# EAGLE board sensact_eagle_2.0g (EAGLE 7.5.0)
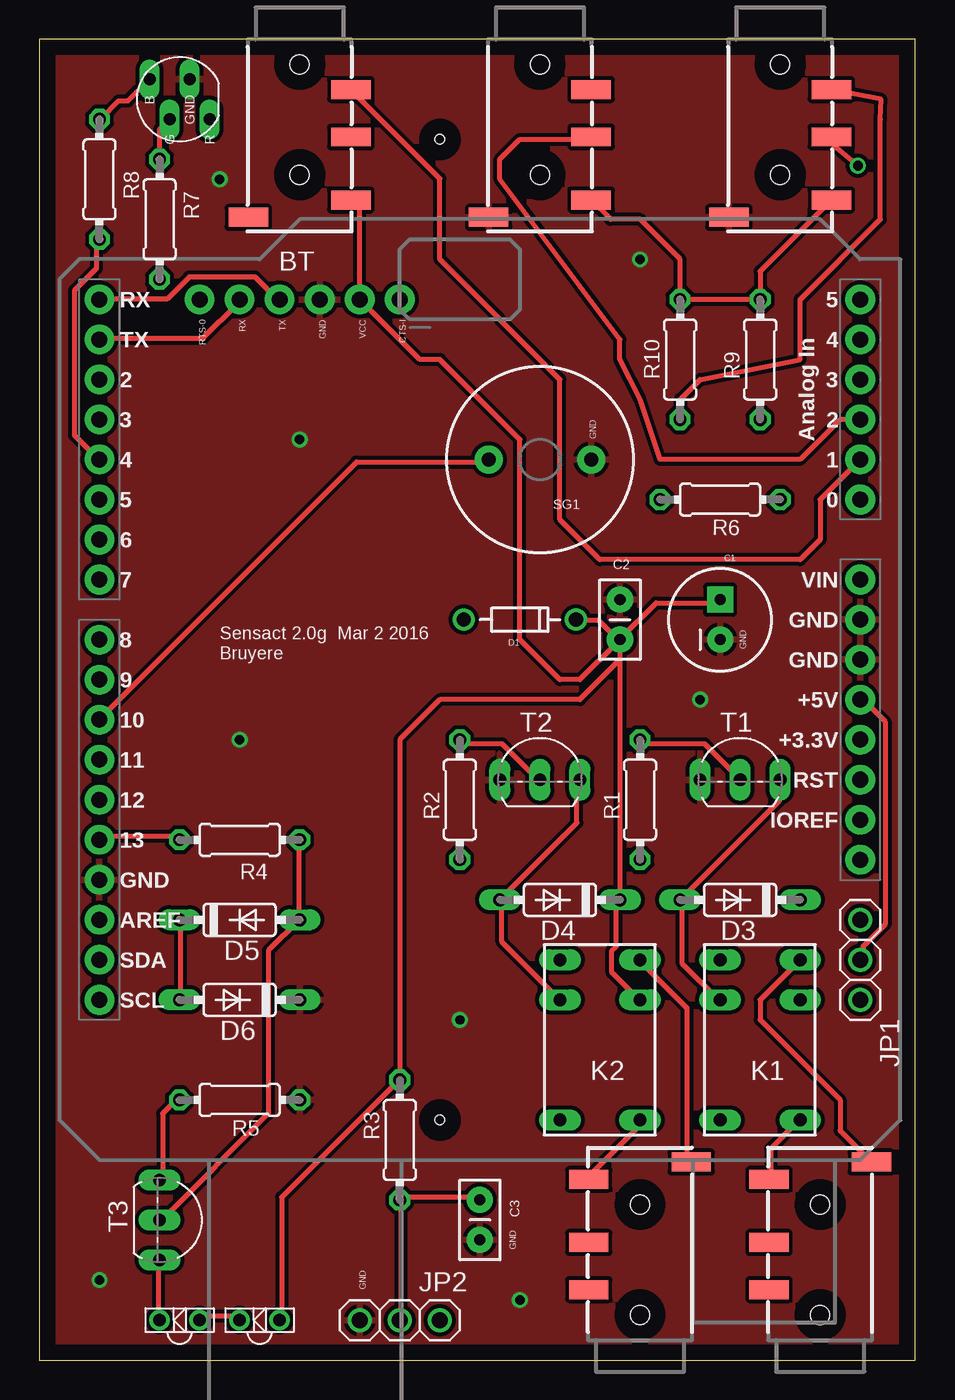
[diagram p0: board, top side]
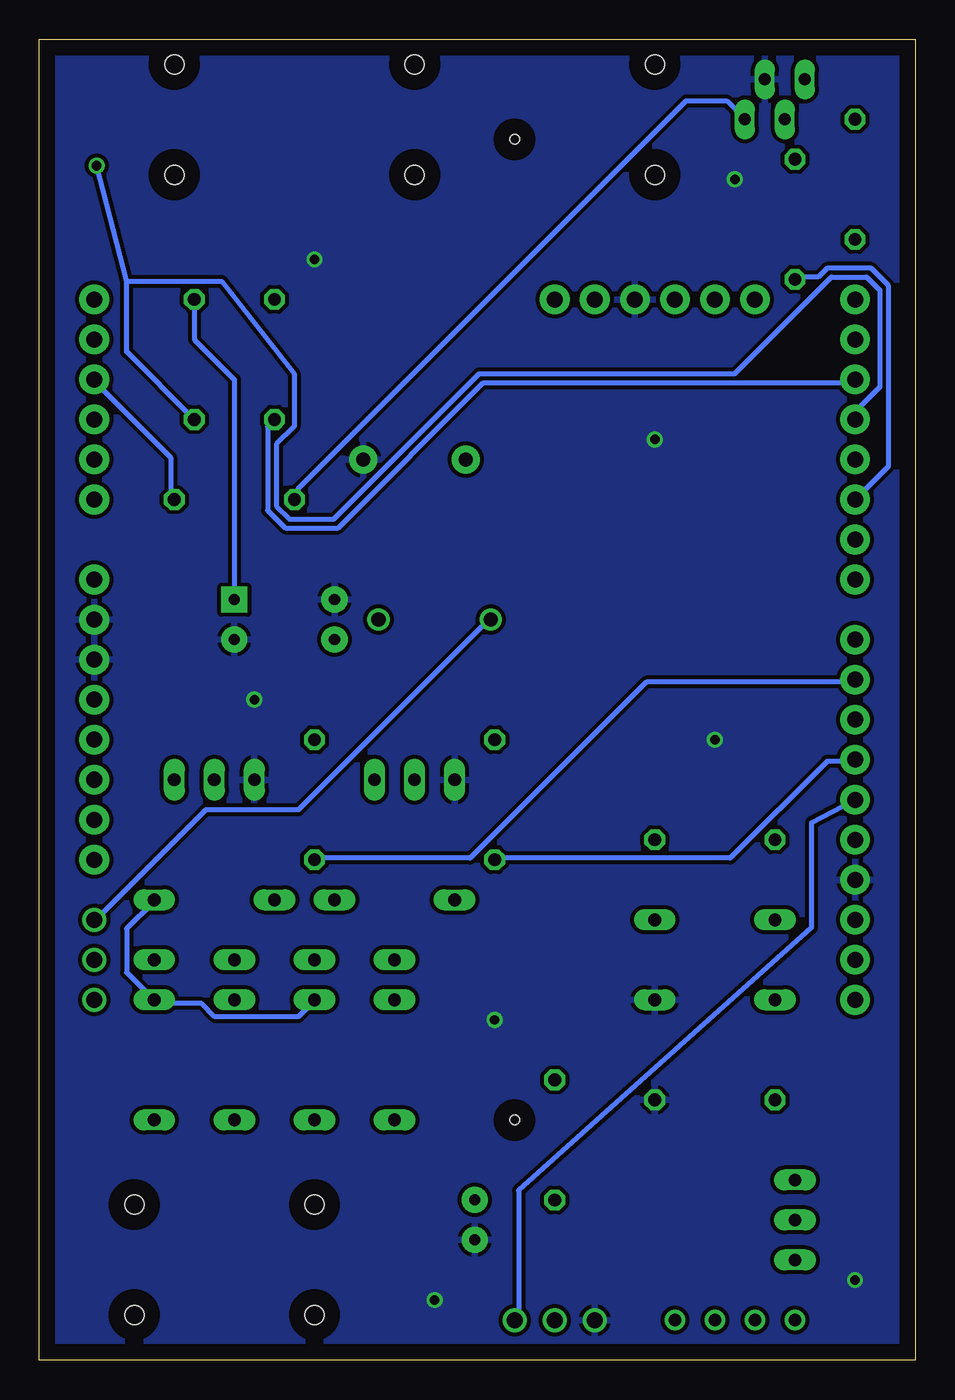
[diagram p1: board, bottom side, seen from below]

Size 55.55 x 83.81 mm. Coordinates in mm from the lower left corner, seen from the top.
Outline: 0,0 55.55,0 55.55,83.81 0,83.81 0,0
Copper layers (1*16): Top 0.035mm / dielectric 1.5mm / Bottom 0.035mm
Design rules "default *": minimum track width 10mil, minimum drill 20mil, track to track 8mil, track to pad 8mil, pad to pad 8mil, via to via 8mil, smd to smd 8mil, copper to edge 40mil, drill to drill 8mil, minimum pad ring 10mil, minimum via ring 8mil, stop-mask expansion 4mil, vias tented up to drill 0mil, thermal gap 10mil
Net classes: 0 default: width 0.305 mm, drill 0.508 mm, clearance 0.254 mm
Holes 0.6 mm at 25.4,77.47 25.4,15.24

## Footprints (pad centres in the part's own frame; a part is rotated, then mirrored left to right if it is on the bottom)
1X06_NO_SILK = drill 1.016 pad 1.88: 1 0,0; 2 2.54,0; 3 5.08,0; 4 7.62,0; 5 10.16,0; 6 12.7,0
CPOL-RADIAL-100UF-25V = drill 0.7 pad 1.651 square: 1 1.27,0 | drill 0.7 pad 1.651: 2 -1.27,0
CAP-PTH-SMALLEZ = drill 0.7 pad 1.651: 1 0,0; 2 2.54,0
DIODE-ZENER = drill 0.9: P$1 -3.556,0; P$2 3.556,0
DO35-7 = drill 0.813 long: A 3.81,0; C -3.81,0
LTE-302 = drill 0.8: A 1.27,0; C -1.27,0
OFFSET_RGB_THRU = drill 0.762 pad 0.889 long: 1 1.905,-1.27; 2 0.635,1.27; 3 -0.635,-1.27; 4 -1.905,1.27
UNO_R3_SHIELD = drill 1.016 pad 1.88: 3.3V 50.8,26.67; 5V 50.8,29.21; A0 50.8,41.91; A1 50.8,44.45; A2 50.8,46.99; A3 50.8,49.53; A4 50.8,52.07; A5 50.8,54.61; AREF 2.54,15.24; D2 2.54,49.53; D3 2.54,46.99; D4 2.54,44.45; D5 2.54,41.91; D6 2.54,39.37; D7 2.54,36.83; D8 2.54,33.02; D9 2.54,30.48; D10 2.54,27.94; D11 2.54,25.4; D12 2.54,22.86; D13 2.54,20.32; GND@0 50.8,31.75; GND@1 50.8,34.29; GND@2 2.54,17.78; IOREF 50.8,21.59; NC 50.8,19.05; RES 50.8,24.13; RX 2.54,54.61; SCL 2.54,10.16; SDA 2.54,12.7; TX 2.54,52.07; VIN 50.8,36.83
1X03 = drill 1.016: 1 -2.54,0; 2 0,0; 3 2.54,0
G5V1 = drill 0.813 long: 1 -5.08,-2.54; 2 -2.54,-2.54; 5 5.08,-2.54; 6 5.08,2.54; 9 -2.54,2.54; 10 -5.08,2.54
0204/7 = drill 0.813 octagon: 1 -3.81,0; 2 3.81,0
BUZZER-12MM = drill 0.9 pad 1.778: + 3.25,0; - -3.25,0
TO92-EBC = drill 0.813 long: B 0,-1.27; C 2.54,-1.27; E -2.54,-1.27
AUDIO-JACK-TRRS-SMD = smd 1.2 x 2.5: EARTH 11.3,-3.25; RING1 6.2,3.25; RING2 3.2,3.25; TIP 10.2,3.25 | hole 1.2: 1.6,0; 8.6,0

## Placement (x,y rotation side)
BT  [1X06_NO_SILK]  10.16,67.31 0 top
C1  100uf  [CPOL-RADIAL-100UF-25V]  43.18,46.99 90 top
C2  0.1uf  [CAP-PTH-SMALLEZ]  36.83,45.72 90 top
C3  330nf  [CAP-PTH-SMALLEZ]  27.94,10.16 270 top
D1  DIODE-ZENERPTH  [DIODE-ZENER]  30.48,46.99 180 top
D3  1N4148DO35-7  [DO35-7]  44.45,29.21 180 top
D4  1N4148DO35-7  [DO35-7]  33.02,29.21 180 top
D5  1N4148DO35-7  [DO35-7]  12.7,27.94 0 top
D6  1N4148DO35-7  [DO35-7]  12.7,22.86 180 top
D7  940nm  [LTE-302]  13.97,2.54 0 top
D8  940nm  [LTE-302]  8.89,2.54 0 top
D9  OFFSET_RGB_LED_CCOFFSET_RGB_LED_THRU  [OFFSET_RGB_THRU]  8.89,80.01 0 top
J7  ARDUINO_R3_SHIELD  [UNO_R3_SHIELD]  1.27,12.7 0 top
JP1  [1X03]  52.07,25.4 270 top
JP2  [1X03]  22.86,2.54 0 top
K1  G5V1  [G5V1]  45.72,20.32 270 top
K2  G5V1  [G5V1]  35.56,20.32 270 top
R1  220  [0204/7]  38.1,35.56 90 top
R2  220  [0204/7]  26.67,35.56 90 top
R3  220  [0204/7]  22.86,13.97 90 top
R4  220  [0204/7]  12.7,33.02 0 top
R5  220  [0204/7]  12.7,16.51 180 top
R6  220  [0204/7]  43.18,54.61 180 top
R7  220  [0204/7]  7.62,72.39 90 top
R8  220  [0204/7]  3.81,74.93 90 top
R9  1.5K  [0204/7]  45.72,63.5 90 top
R10  1.5K  [0204/7]  40.64,63.5 90 top
SG1  BUZZERPTH  [BUZZER-12MM]  31.75,57.15 180 top
T1  2n4401  [TO92-EBC]  44.45,38.1 0 top
T2  2n4401  [TO92-EBC]  31.75,38.1 0 top
T3  2n4401  [TO92-EBC]  8.89,8.89 270 top
U$1  AUDIO-JACK3  [AUDIO-JACK-TRRS-SMD]  46.99,83.82 270 top
U$2  AUDIO-JACK3  [AUDIO-JACK-TRRS-SMD]  31.75,83.82 270 top
U$3  AUDIO-JACK3  [AUDIO-JACK-TRRS-SMD]  16.51,83.82 270 top
U$4  AUDIO-JACK3  [AUDIO-JACK-TRRS-SMD]  49.53,1.27 90 top
U$5  AUDIO-JACK3  [AUDIO-JACK-TRRS-SMD]  38.1,1.27 90 top

## Library data of the parts
BT = SparkFun-Connectors; PROD_ID: CONN-08437
C1-C3 = SparkFun-Capacitors
D1 = SparkFun-DiscreteSemi
D3-D6 = diode
D7 D8 = SparkFun-LED
D9 = bruce
J7 = SparkFun-Boards
JP1 JP2 = adafruit
K1 K2 = relay; MPN: G5V-1-DC24; OC_FARNELL: 9949593; OC_NEWARK: 36M6377
R1-R10 = eagle-ltspice; SPICEMODEL: NONE; SPICEPREFIX: R
SG1 = SparkFun-Electromechanical
T1-T3 = transistor-neu-to92
U$1-U$5 = SparkFun-Connectors

## Nets
A1: J7.A1 U$3.RING2
A2: J7.A2 U$2.RING1
A3: J7.A3 R6.1
DECOUP_VCC: BT.5 C1.1 C2.1 D1.P$1 D3.C D4.C D7.A K1.9 K2.9 R3.2 R9.2 R10.2 U$1.TIP U$2.TIP U$3.TIP
GND: BT.4 C1.2 C2.2 C3.2 D6.C D9.2 J7.GND@0 J7.GND@1 J7.GND@2 JP2.1 R5.1 SG1.- T1.E T2.E U$1.EARTH U$2.EARTH
IO2: J7.D2 R10.1 U$1.RING2
IO3*: J7.D3 R9.1 U$1.RING1
IO4: J7.D4 R8.1
IO5*: J7.D5 R7.1
IO9*: J7.D9 R1.1
IO10*: J7.D10 SG1.+
IO11*: J7.D11 R2.1
IO12: J7.D12 JP2.3
IO13*: J7.D13 R4.1
N$1: K1.6 U$4.TIP
N$2: K1.10 U$4.EARTH
N$3: K2.6 U$5.TIP
N$4: K2.10 U$5.EARTH
N$5: D4.A K2.2 T2.C
N$7: D3.A K1.2 T1.C
N$9: R1.2 T1.B
N$10: R2.2 T2.B
N$11: C3.1 JP2.2 R3.1
N$12: D7.C D8.A
N$13: D8.C T3.C
N$14: D5.A R4.2 T3.B
N$15: R5.2 T3.E
N$17: D9.3 R7.2
N$18: D5.C D6.A
N$19: D9.1 R6.2
N$20: D9.4 R8.2
RX: BT.3 J7.RX
SW_VCC: D1.P$2 JP1.1
TX: BT.2 J7.TX
VCC: J7.5V JP1.2

## Tracks (layer width: path | path; a pad name or v marks a point on that pad's centre or on a via)
A1
  Top 0.305: J7.A1 49.53,54.61 49.53,52.07 48.26,50.8 35.56,50.8 33.02,53.34 33.02,62.23 25.4,69.85 25.4,74.98 U$3.RING2
A2
  Top 0.305: J7.A2 50.8,59.69 48.26,57.15 39.37,57.15 38.1,60.96 36.83,63.5 36.83,64.77 29.21,74.93 29.21,76.2 30.48,77.47 34.85,77.47 U$2.RING1
A3
  Bottom 0.305: R6.1 47.22,54.76 47.22,57.28 51.97,62.03 J7.A3
DECOUP_VCC
  Top 0.305: D7.A 15.37,2.79 15.37,10.34 22.63,17.6 R3.2 22.86,39.37 25.4,41.91 34.29,41.91 36.83,44.45 | 45.54,67.33 R9.2 | U$1.TIP 45.72,69.1 R9.2 | U$2.TIP 36.23,72.39 38.1,72.39 40.64,69.85 R10.2 40.79,67.33 45.7,67.33 R9.2 | U$3.TIP 20.32,73.06 BT.5 24.13,63.5 25.4,63.5 30.48,58.42 30.48,45.72 33.02,43.18 34.29,43.18 36.65,45.54 36.83,45.54 | D1.P$1 34.09,46.94 35.48,46.94 36.6,45.82 C2.1 | C1.1 43.03,48.06 39.12,48.06 36.88,45.82 C2.1 | 36.83,45.54 36.83,44.45 | D4.C 36.6,29.06 36.6,26.26 36.32,25.98 36.32,24.59 38,22.91 K2.9 | 36.88,29.34 D4.C | 36.88,45.54 36.83,45.54 | 36.83,44.45 D4.C | C2.1 36.83,45.54
  Bottom 0.305: D3.C 48.34,29.06 50.01,27.38 50.01,24.59 48.34,22.91 K1.9 48.26,22.84 48.06,22.63 45.26,22.63 44.42,21.79 39.12,21.79 38.28,22.63 K2.9 | R9.2 45.72,64.77 43.18,62.23 C1.1
GND  (via drill 0.6)
  other vias: 12.7,39.37 16.51,58.42 38.1,69.85 26.67,21.59 3.81,5.08 30.48,3.81 41.91,41.91 11.43,74.93
  pour Top: -1.27,85.09 -1.27,-1.27 57.15,-1.27 57.15,85.09
  pour Bottom: 0,83.82 0,0 55.88,0 55.88,83.82
IO2
  Top 0.305: R10.1 40.64,60.96 41.91,62.23 48.26,63.5 48.26,67.31 53.34,72.39 53.34,78.74 53.39,80.01 U$1.RING2
  Bottom 0.305: J7.D2 3.91,62.03 27.38,62.03 36.6,52.81 39.95,52.81 41.07,53.92 41.07,59.23 40.79,59.51 R10.1
IO3*  (via drill 0.61)
  Top 0.305: v51.92,75.79 50.01,77.39 U$1.RING1
  Bottom 0.305: 50.01,68.45 50.01,63.98 R9.1 | 50.01,68.45 v51.92,75.79 | 50.01,68.45 43.99,68.45 39.4,62.59 39.4,59.23 40.51,58.12 40.51,54.2 39.67,53.37 36.88,53.37 27.66,62.59 11.46,62.59 5.31,68.73 3.07,68.73 2.23,67.89 2.23,61.75 3.63,60.35 3.63,59.79 J7.D3
IO4
  Top 0.305: R8.1 3.63,70.97 3.63,69.29 2.23,67.89 2.23,58.67 3.63,57.28 J7.D4
IO5*
  Bottom 0.305: R7.1 7.54,68.73 6.15,68.73 5.59,69.29 2.79,69.29 1.68,68.17 1.68,56.72 3.63,54.76 J7.D5
IO9*
  Bottom 0.305: R1.1 38,31.85 28.22,31.85 17.04,43.03 3.91,43.03 J7.D9
IO10*
  Top 0.305: SG1.+ 28.5,57 20.12,57 3.91,40.79 J7.D10
IO11*
  Bottom 0.305: R2.1 26.54,31.85 11.73,31.85 5.59,38 3.91,38 J7.D11
IO12
  Bottom 0.305: JP2.3 25.15,2.79 25.15,10.77 6.58,27.43 6.58,34.09 3.91,35.48 J7.D12
IO13*
  Top 0.305: R4.1 8.66,33.25 3.91,33.25 J7.D13
N$1
  Top 0.305: U$4.TIP 46.38,11.73 46.38,13.41 48.06,15.09 K1.6
N$2
  Top 0.305: K1.10 45.72,22.86 45.72,21.59 50.8,16.51 50.8,14.55 U$4.EARTH
N$3
  Top 0.305: U$5.TIP 34.92,11.73 38.28,15.09 K2.6
N$4
  Top 0.305: U$5.EARTH 41.07,12.57 41.07,22.35 38.28,25.15 K2.10
N$5
  Top 0.305: K2.2 29.34,26.54 29.34,29.06 D4.A 34.09,34.09 34.09,36.6 T2.C
N$7
  Top 0.305: K1.2 43.03,22.91 40.79,25.15 40.79,29.06 D3.A 40.79,29.34 46.94,35.48 46.94,36.6 T1.C
N$9
  Top 0.305: T1.B 44.42,36.88 42.19,39.12 38.28,39.12 R1.2
N$10
  Top 0.305: T2.B 31.57,36.88 29.34,39.12 26.82,39.12 R2.2
N$11
  Top 0.305: C3.1 27.94,10.34 22.91,10.34 R3.1 22.91,10.06 22.91,2.79 JP2.2
N$12
  Top 0.305: D8.A 10.34,2.79 12.57,2.79 D7.C
N$13
  Top 0.305: D8.C 7.54,2.79 7.54,6.15 T3.C
N$14
  Top 0.305: 16.48,27.94 14.53,25.98 14.53,15.65 7.82,8.94 T3.B | 16.48,27.94 16.48,32.97 R4.2 | 16.48,27.94 D5.A
N$15
  Top 0.305: T3.E 7.82,11.46 7.82,15.65 8.66,16.48 R5.2
N$17
  Top 0.305: R7.2 7.62,78.11 D9.3
N$18
  Top 0.305: D6.A 8.94,22.91 8.94,27.94 D5.C
N$19
  Bottom 0.305: R6.2 39.12,54.76 39.12,55.32 14.53,79.91 11.96,79.91 D9.1
N$20
  Top 0.305: R8.2 3.91,78.79 5.03,79.91 5.61,79.91 D9.4
RX
  Top 0.305: J7.RX 3.91,67.33 8.1,67.33 9.5,68.73 13.69,68.73 15.09,67.33 BT.3
SW_VCC
  Bottom 0.305: JP1.1 51.97,27.94 44.98,34.92 39.12,34.92 27.1,46.94 D1.P$2
TX
  Top 0.305: J7.TX 3.91,64.82 10.34,64.82 12.57,67.06 BT.2
VCC
  Top 0.305: JP1.2 52.25,25.43 52.25,26.26 53.65,27.66 53.65,40.51 52.25,41.91 J7.5V

## Text on the board
_tsilk: RTS-0 | RX | TX | GND | VCC | CTS-I | GND | Sensact 2.0g Mar 2 2016 | GND | Bruyere | GND | GND